# Altium PCB PCB1a.PcbDoc
Units mm, origin at the board's own origin, x right, y up, seen from the top; angles counter-clockwise.
Board outline 99.95 x 99.82 mm, 2 copper layers (Top Layer, Bottom Layer); 56 components, 64 nets, 272 pads, 29 vias.
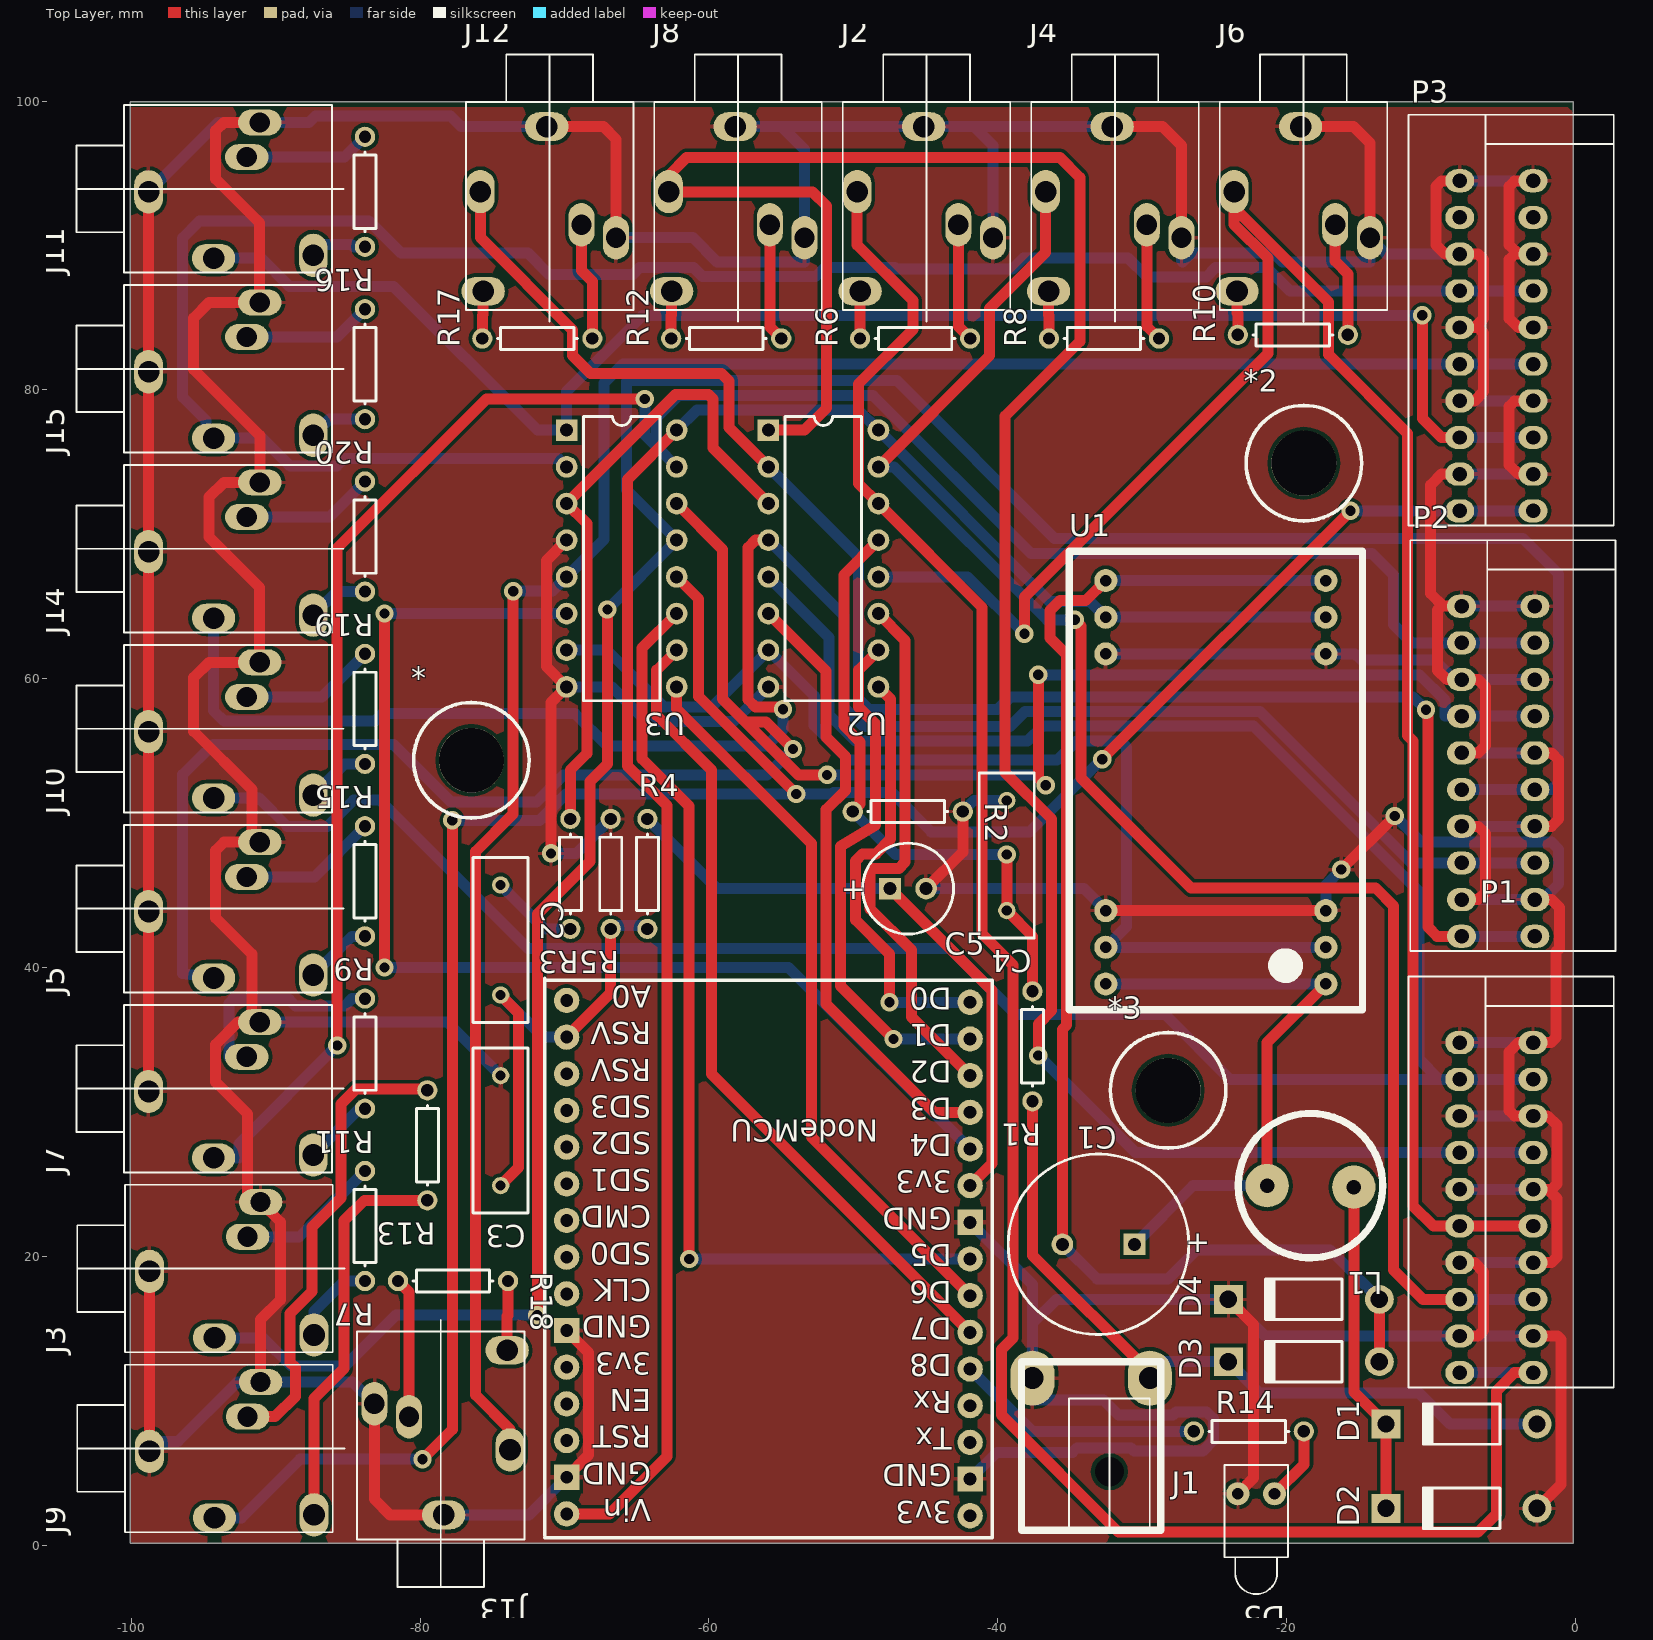
[diagram p0: Top Layer view]
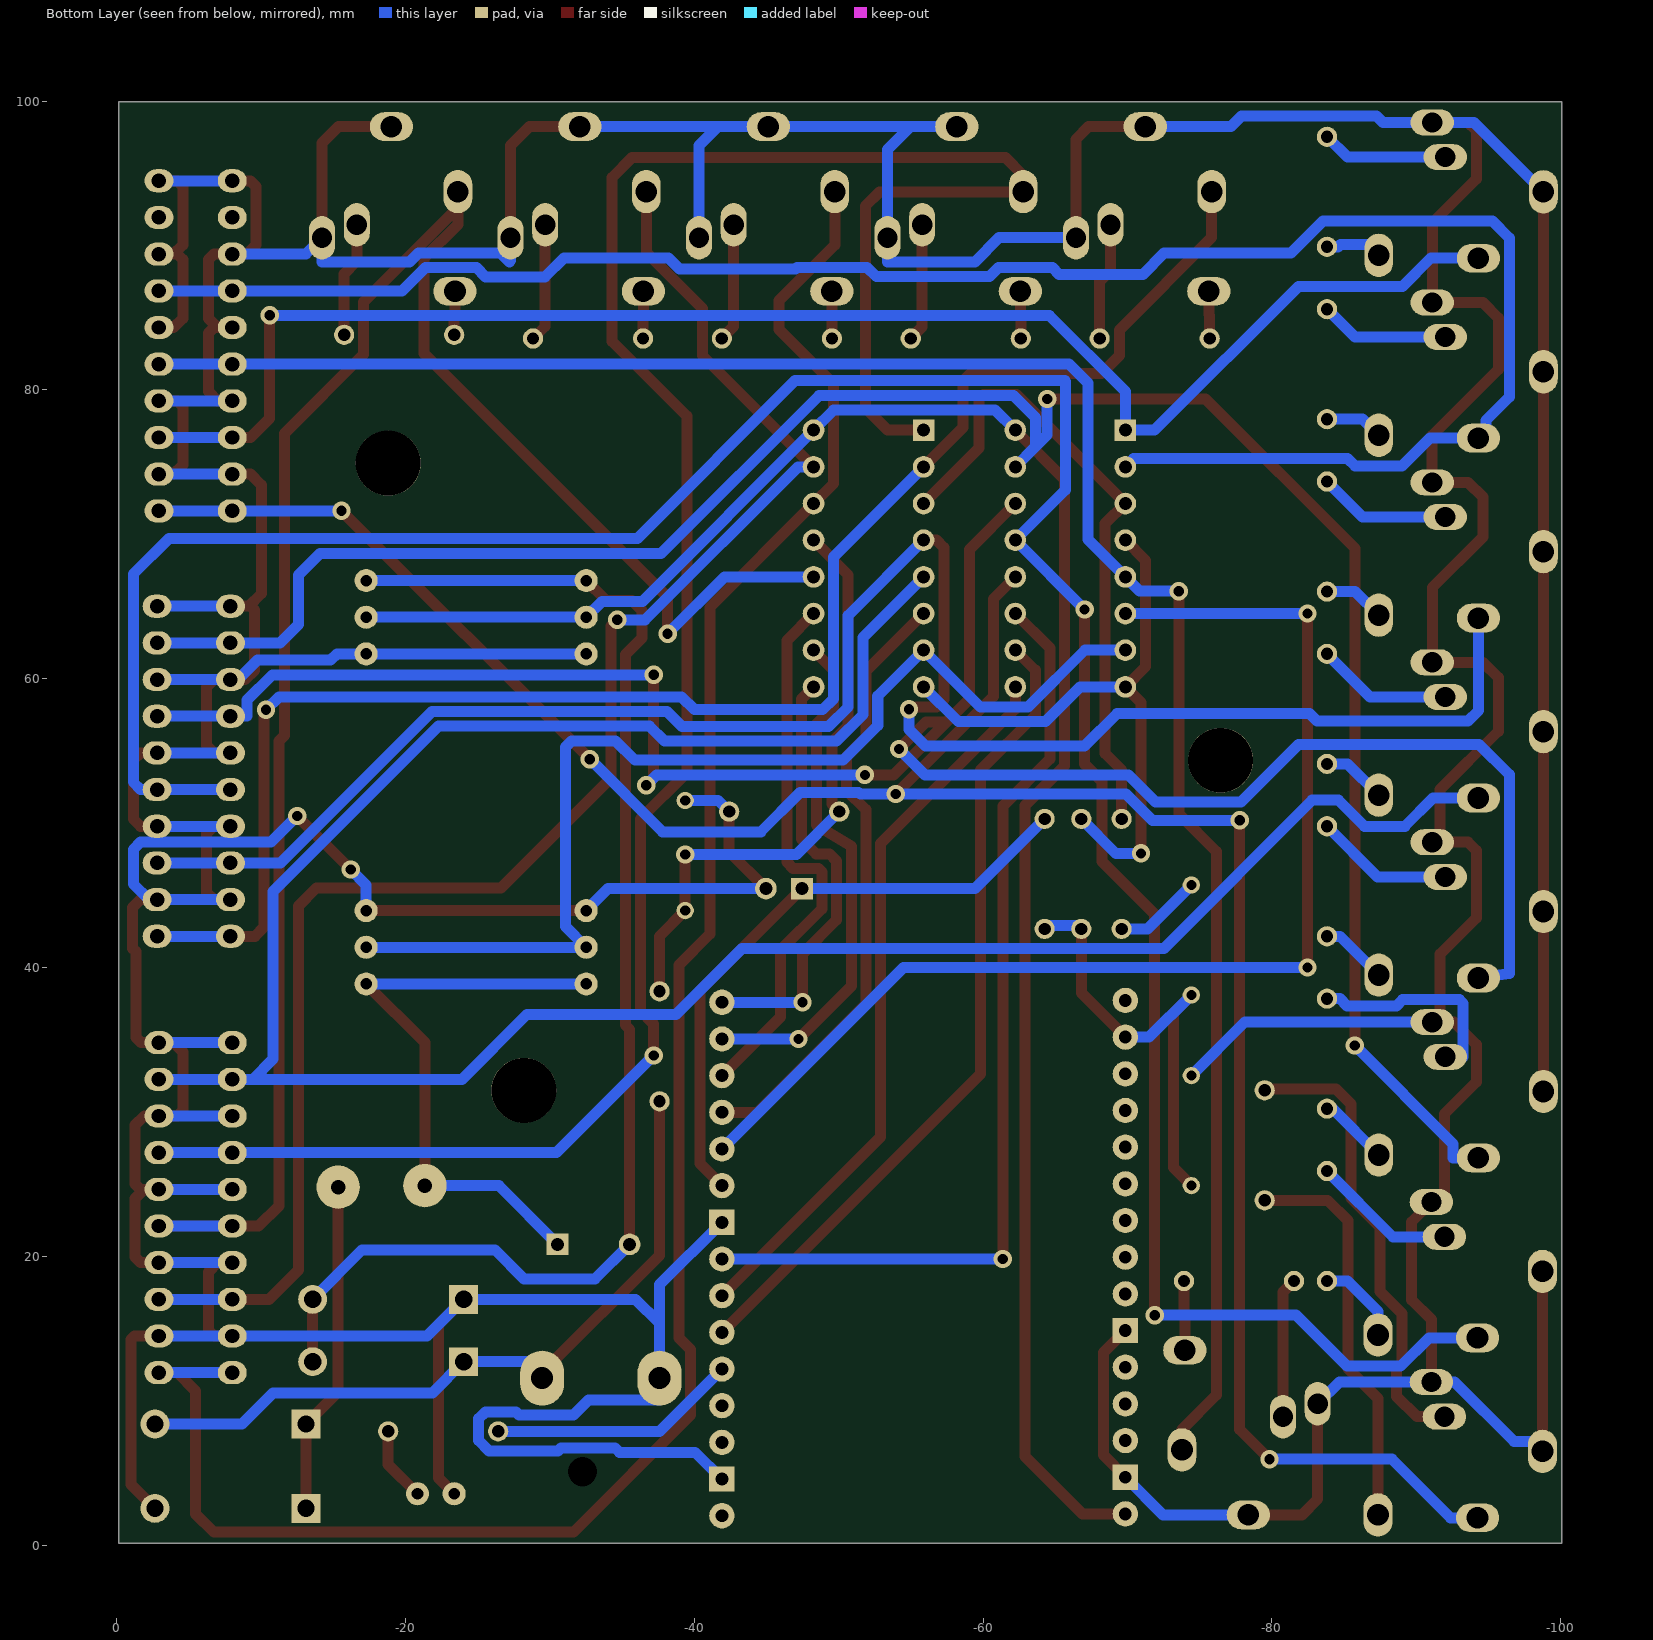
[diagram p1: Bottom Layer view, seen from below]

## Layer stack, top to bottom
Top Solder: solder mask 0.0102, Solder Resist, Dk 3.5
Top Layer: signal copper 0.0356
Dielectric 1: dielectric 0.32, FR-4, Dk 4.8
Bottom Layer: signal copper 0.0356
Bottom Solder: solder mask 0.0102, Solder Resist, Dk 3.5

## Board outline
-100.076,0.127 -0.127,0.127 -0.127,99.949 -100.076,99.949

## Design rules (kind name [scope] priority, off if disabled: settings)
Clearance Clearance_silk [OnLayer('Top Overlay')] p1: gap=0
Clearance [All] p2: gap=0.254
Height [All] p1 off: minheight=0 maxheight=25.4 prefheight=12.7
PolygonConnect [All] p1: connectstyle=Relief reliefconductorwidth=0.254 reliefentries=4 polygonreliefangle="90 Angle" airgapwidth=0.254
RoutingVias [All] p1: holewidth=0.711 width=1.27 viastyle="Through Hole" minholewidth=0.711 minwidth=1.27 maxholewidth=0.711 maxwidth=1.27
SilkToSilkClearance [All] p1 off: silktosilkclearance=0.254
SilkToSolderMaskClearance [IsPad] p1 off: minsilkscreentomaskgap=0.254 clearancetoexposedcopper=TRUE
SolderMaskExpansion [All] p1: expansion=0.102
Width [All] p1: maxlimit=2.54 minlimit=0.178 preferedwidth=0.762
27 further rules are at their usual default settings.

## Components (designator, comment, footprint, x,y, rotation, side; value= is the part's Value field where it differs from the comment)
* "M4 iso mount hole" "M4 HOLE" -76.454,54.356 r0 top
*2 "M4 iso mount hole" "M4 HOLE" -18.796,74.93 r0 top
*3 "M4 iso mount hole" "M4 HOLE" -28.194,31.496 r0 top
C1 "Cap Pol1" CAPPR5-12.5x25 -33.02,20.828 r180 top
C2 "Cap" RAD-0.3 -74.422,41.91 r90 top
C3 "Cap" RAD-0.3 -74.422,28.702 r270 top
C4 "Cap" RAD-0.3 -39.37,47.752 r270 top
C5 "Cap Pol1" CAPPR2.5-6.3x6.8/H.9 -46.208,45.466 r0 top
D1 "Diode 1N4001" DO-41 -7.874,8.382 r180 top
D2 "Diode 1N4001" DO-41 -7.874,2.54 r180 top
D3 "Diode 1N4001" DO-41 -18.796,12.7 r180 top
D4 "Diode 1N4001" DO-41 -18.796,17.018 r180 top
D5 "LED1" LED-1 -22.098,3.556 r270 top
J1 "Phonejack2" "Power jack 6x2mm" -38.354,12.7 r270 top
J2 "Phonejack Stereo SW" SJ1-3515 -39.228,85.64 r90 top
J3 "Phonejack Stereo SW" SJ1-3515 -86.148,24.852 r180 top
J4 "Phonejack Stereo SW" SJ1-3515 -26.175,85.64 r90 top
J5 "Phonejack Stereo SW" SJ1-3515 -86.206,49.777 r180 top
J6 "Phonejack Stereo SW" SJ1-3515 -13.122,85.64 r90 top
J7 "Phonejack Stereo SW" SJ1-3515 -86.206,37.315 r180 top
J8 "Phonejack Stereo SW" SJ1-3515 -52.281,85.64 r90 top
J9 "Phonejack Stereo SW" SJ1-3515 -86.148,12.39 r180 top
J10 "Phonejack Stereo SW" SJ1-3515 -86.206,62.239 r180 top
J11 "Phonejack Stereo SW" SJ1-3515 -86.206,99.626 r180 top
J12 "Phonejack Stereo SW" SJ1-3515 -65.334,85.64 r90 top
J13 "Phonejack Stereo SW" SJ1-3515 -84.272,14.69 r270 top
J14 "Phonejack Stereo SW" SJ1-3515 -86.206,74.701 r180 top
J15 "Phonejack Stereo SW" SJ1-3515 -86.206,87.164 r180 top
L1 "Inductor Iron" "Radial Vert Cylinder 10x19-6mm" -18.336,24.892 r180 top
NodeMCU "NodeMCU DevKit v1.0" "NodeMCU v0.9" -41.91,37.592 r180 top
P1 "Header 10" "Spring Terminal" -2.921,11.938 r90 top
P2 "Header 10" "Spring Terminal" -2.794,42.164 r90 top
P3 "Header 10" "Spring Terminal" -2.921,71.628 r90 top
R1 "Res1" AXIAL-0.3 -37.592,34.544 r270 top
R2 "Res1" AXIAL-0.3 -46.228,50.8 r0 top
R3 "Res1" AXIAL-0.3 -69.596,46.482 r270 top
R4 "Res1" AXIAL-0.3 -64.262,46.482 r90 top
R5 "Res1" AXIAL-0.3 -66.802,46.482 r270 top
R6 "Res1" AXIAL-0.3 -45.72,83.566 r180 top
R7 "Res1" AXIAL-0.3 -83.82,22.098 r270 top
R8 "Res1" AXIAL-0.3 -32.639,83.566 r180 top
R9 "Res1" AXIAL-0.3 -83.82,45.974 r270 top
R10 "Res1" AXIAL-0.3 -19.558,83.82 r180 top
R11 "Res1" AXIAL-0.3 -83.82,34.036 r270 top
R12 "Res1" AXIAL-0.3 -58.801,83.566 r180 top
R13 "Res1" AXIAL-0.3 -79.502,27.686 r270 top
R14 "Res1" AXIAL-0.3 -22.606,7.874 r0 top
R15 "Res1" AXIAL-0.3 -83.82,57.912 r270 top
R16 "Res1" AXIAL-0.3 -83.82,93.726 r270 top
R17 "Res1" AXIAL-0.3 -71.882,83.566 r180 top
R18 "Res1" AXIAL-0.3 -77.724,18.288 r0 top
R19 "Res1" AXIAL-0.3 -83.82,69.85 r270 top
R20 "Res1" AXIAL-0.3 -83.82,81.788 r270 top
U1 "EC3AW04" EC3AW -14.732,37.084 r90 top
U2 "MC74HC4051N" 648-08 -52.07,68.326 r270 top
U3 "MC74HC4051N" 648-08 -66.04,68.326 r270 top

## Footprints (in the part's own frame and the unit in brackets; to place one, negate y for a bottom-side part, rotate by r counter-clockwise, add the part's x,y. Pads: shape width x height; smd on the part's side, far side on the other; paste and mask are expansions set on the pad)
648-08 [mm] "DIP; 16 Leads; Row Spacing 7.62 mm; Pitch 2.54 mm"
  rect 1.5x1.5 hole 0.9: 1(-8.89,-3.81)
  round 1.5 hole 0.9: 2(-6.35,-3.81) 3(-3.81,-3.81) 4(-1.27,-3.81) 5(1.27,-3.81) 6(3.81,-3.81) 7(6.35,-3.81) 8(8.89,-3.81) 9(8.89,3.81) 10(6.35,3.81) 11(3.81,3.81) 12(1.27,3.81) 13(-1.27,3.81) 14(-3.81,3.81) 15(-6.35,3.81) 16(-8.89,3.81)
  silkscreen extent -9.85,-2.65 9.85,2.65
AXIAL-0.3 [mm] "Axial Device, Thru-Hole; 2 Leads; 0.3 in Pin Spacing"
  round 1.4 hole 0.85: 1(-3.81,0) 2(3.81,0)
  silkscreen extent -2.77,-0.76 2.77,0.76
CAPPR2.5-6.3x6.8/H.9 [mm] "Capacitor, Electrolytic, Radial; Body 6.3 x 6.8 mm (Dia.xH typ); Pin Spacing 2.5 mm (typ)"
  rect 1.5x1.5 hole 0.9: 1(-1.25,0)
  round 1.5 hole 0.9: 2(1.25,0)
  silkscreen extent -3.15,-3.15 3.15,3.15
CAPPR5-12.5x25 [mm] "Capacitor, Electrolytic, Radial; Body 12.5 x 25 mm (Dia.xH typ); Pin Spacing 5 mm (typ)"
  rect 1.5x1.5 hole 0.9: 1(-2.5,0)
  round 1.5 hole 0.9: 2(2.5,0)
  silkscreen extent -6.25,-6.25 6.25,6.25
DO-41 [mm] "Diode, Axial; Body 5.2 x 2.7 mm (LxDia. max), Lead Dia. 0.86 mm (max)"
  round 2 hole 1.2: 1(-5.23,0)
  rect 2x2 hole 1.2: 2(5.23,0)
  silkscreen extent -2.65,-1.4 2.75,1.4
EC3AW [mm]
  round 1.6 hole 0.8: 1(1.778,17.78) 1(1.778,2.54) 2(4.318,17.78) 2(4.318,2.54) 3(6.858,17.78) 3(6.858,2.54) 10(24.638,2.54) 10(24.638,17.78) 11(27.178,2.54) 11(27.178,17.78) 12(29.718,2.54) 12(29.718,17.78)
  silkscreen extent 0,0 31.75,20.32, body extent 0,0 31.75,20.32, height 10.16
LED-1 [mm] "LED; 2 Leads"
  round 1.6 hole 0.8: 1(0,1.27) 2(0,-1.27)
  silkscreen extent -2,-2.2 6.95,2.2
"M4 HOLE" [mm] "Isolated M4 mounting hole"
  round 4.5 hole 4.5 unplated paste+0.5: 0(0,0)
  Top Overlay keep-out circle w0.254: c0,0 r4
  silkscreen extent -4,-4 4,4
"NodeMCU v0.9" [mil]
  round 69 hole 35: 1(0,1400) 3(0,1200) 4(0,1100) 5(0,1000) 6(0,900) 7(0,800) 8(0,700) 10(0,500) 11(0,400) 12(0,300) 13(0,200) 14(0,100) 15(0,0) 16(1100,-5) 17(1100,95) 18(1100,195) 19(1100,295) 20(1100,395) 21(1100,495) 22(1100,595) 23(1100,695) 24(1100,795) 26(1100,995) 27(1100,1095) 28(1100,1195) 30(1100,1395)
  rect 69x69 hole 35: 2(0,1300) 9(0,600) 25(1100,895) 29(1100,1295)
  silkscreen extent -60,-65 1160,1460
"Power jack 6x2mm" [mil]
  round 0 hole 80 unplated: key(300,240)
  oval 150x120 hole 60: S(45,30) T(45,350)
  silkscreen extent 0,0 460,380, body extent 0,0 460,380, height 270
RAD-0.3 [mm] "Radial Cap, Thru-Hole; 2 Leads; 0.3 in Pin Spacing"
  round 1.2 hole 0.7: 1(-3.81,0) 2(3.81,0)
  silkscreen extent -5.71,-1.91 5.71,1.91
"Radial Vert Cylinder 10x19-6mm" [mm]
  round 3 hole 1: 1(-3,0.1) 2(3,0)
  silkscreen extent -5,-5 5,5, body extent -5,-5 5,5, height 19
SJ1-3515 [mm]
  oval 2x3 hole 1.5: 1-gnd(12.6,5.9) 5-tip-sw(1.2,10.3)
  oval 3x2 hole 1.5: 2-tip(8.1,10.5)
  oval 3x1.8 hole 1.4: 3-mid(4.9,1.1) 4-mid-sw(5.8,3.5)
  silkscreen extent -0.9,-0.1 17.6,11.5, body extent 0,0 14.2,11.4, height 1
"Spring Terminal" [mm]
  oval 1.6x2 hole 1: 1(0,5.08) 1(0,0) 2(2.54,5.08) 2(2.54,0) 3(5.08,0) 3(5.08,5.08) 4(7.62,0) 4(7.62,5.08) 5(10.16,0) 5(10.16,5.08) 6(12.7,0) 6(12.7,5.08) 7(15.24,0) 7(15.24,5.08) 8(17.78,0) 8(17.78,5.08) 9(20.32,0) 9(20.32,5.08) 10(22.86,0) 10(22.86,5.08)
  silkscreen extent -1.02,-5.59 27.43,8.64, body extent -0.8,-5.5 27.14,8.47, height 1

## Part data
C1 C5: "Polarized Capacitor (Radial)"
C2 C3 C4: "Capacitor"
D1 D2 D3 D4: "1 Amp General Purpose Rectifier"
D5: "Typical RED GaAs LED"
J1: "Jack Socket, 1/4\" [6.5mm], Thru-Hole, Vertical, 2-Conductor Open Circuit"
J2 J3 J4 J5 J6 J7 J8 J9 J10 J11 J12 J13 J14 J15: "3-Conductor Jack with 2 break contacts (normals) and 2 auxiliary make contacts"
L1: "Magnetic-Core Inductor"
P1 P2 P3: "Header, 10-Pin"
R1 R2 R3 R4 R5 R6 R7 R8 R9 R10 R11 R12 R13 R14 R15 R16 R17 R18 R19 R20: "Resistor"
U2 U3: "8-Channel Analog Multiplexer/Demultiplexer"

## Via types
v1: diameter 1.27, hole 0.711, Top Layer to Bottom Layer, 29 vias

## Nets (pads, with @x,y where several pads share a name; then routed paths per layer and width w, separated by ;. In a path a pad name is that pad's centre, name@x,y a point inside that pad or via, vN(x,y) a via of type N, cw(c..) or ccw(c..) an arc to the next point about the centre after c; other vN are vias at no path point)
A1: NodeMCU.13 U2.11 | length 37.7
  Top Layer w0.762: U2.11 -46.406,62.662 -46.406,47.295 -46.838,46.863 -48.59,46.863 -48.844,46.609 -48.844,44.069 -45.974,41.199 -45.974,36.576 NodeMCU.13
A2: NodeMCU.8 U3.11 | length 66.5
  Top Layer w0.762: U3.11 -64.631,62.115 -64.631,54.459 -61.366,51.194 v1(-61.366,19.812)
  Bottom Layer w0.762: v1(-61.366,19.812) NodeMCU.8
ADC: C2.1 C3.2 NodeMCU.17 R4.1 R5.2 | length 31.5
  Top Layer w0.762: C3.2 -73.177,26.137 -73.177,36.855 C2.1 ; NodeMCU.17 -66.802,38.227 R5.2
  Bottom Layer w0.762: C2.1 -71.501,35.179 NodeMCU.17 ; R5.2 -66.568,42.906 -64.496,42.906 R4.1
B1: NodeMCU.14 U2.10 | length 36.2
  Top Layer w0.762: U2.10 -49.645,60.591 -49.645,58.039 -48.457,56.851 -48.457,49.86 -50.876,48.387 -50.876,38.71 v1(-47.219,35.052)
  Bottom Layer w0.762: v1(-47.219,35.052) NodeMCU.14
B2: NodeMCU.6 U3.10 | length 56.8
  Top Layer w0.762: U3.10 -63.615,60.591 -63.615,57.47 -59.817,53.672 -59.817,32.639 NodeMCU.6
C1: NodeMCU.15 U2.9 | length 30.3
  Top Layer w0.762: U2.9 -47.422,58.598 -47.422,48.895 -48.438,47.879 -49.352,47.879 -49.86,47.371 -49.86,43.307 -47.498,40.945 v1(-47.498,37.592)
  Bottom Layer w0.762: v1(-47.498,37.592) NodeMCU.15
C2: NodeMCU.7 U3.9 | length 50.6
  Top Layer w0.762: U3.9 -62.23,57.911 -52.908,48.589 -52.908,28.27 NodeMCU.7
EN1: NodeMCU.12 U2.6 | length 42.9
  Top Layer w0.762: U2.6 -51.892,60.528 -51.892,55.956 -50.546,54.61 -50.546,52.273 -51.892,50.927 -51.892,37.475 -44.389,29.972 NodeMCU.12
EN2: NodeMCU.11 U3.6 | length 82.9
  Top Layer w0.762: v1(-82.474,40.005) v1(-82.474,64.516)
  Bottom Layer w0.762: v1(-82.474,40.005) -54.483,40.005 NodeMCU.11 ; v1(-82.474,64.516) U3.6
GND: C3.1 C4.1 C5.2 D2.1 D4.2 D5.2 J1.S J2.1-gnd J2.3-mid J3.1-gnd J3.3-mid J4.1-gnd J4.3-mid J5.1-gnd J5.3-mid J6.1-gnd J6.3-mid J7.1-gnd J7.3-mid J8.1-gnd J8.3-mid J9.1-gnd J9.3-mid J10.1-gnd J10.3-mid J11.1-gnd J11.3-mid J12.1-gnd J12.3-mid J13.1-gnd J13.3-mid J14.1-gnd J14.3-mid J15.1-gnd J15.3-mid NodeMCU.2 NodeMCU.9 NodeMCU.25 NodeMCU.29 P1.2 P1.4 P1.6 P1.8 P1.10 P2.2 P2.4 P2.6 P2.8 P2.10 P3.2 P3.4 P3.6 P3.8 P3.10 R2.2 R5.1 U1.3 U1.10 U2.8 U3.4 U3.8 | length 843.9
  Top Layer w0.762: J7.1-gnd J5.1-gnd J10.1-gnd J14.1-gnd J15.1-gnd J11.1-gnd ; J9.1-gnd J3.1-gnd ; J7.3-mid J7.3-mid@-91.643,36.215 ; J5.3-mid J5.3-mid@-91.643,48.677 ; J10.3-mid J10.3-mid@-91.11,61.139 ; J15.3-mid J15.3-mid@-91.11,86.064 ; J11.3-mid -93.599,98.526 -94.158,97.967 -94.158,94.615 -91.11,91.567 J15.3-mid@-91.11,86.064 ; J9.3-mid -91.048,15.621 -89.687,16.982 -89.687,22.392 J3.3-mid -91.948,23.752 -91.948,29.87 -94.158,32.08 -94.158,34.671 -92.614,36.215 J7.3-mid@-91.643,36.215 ; J13.3-mid -83.172,3.175 -82.087,2.09 J13.1-gnd ; J12.1-gnd -67.31,98.24 -66.434,97.364 J12.3-mid ; v1(-70.942,47.904) -70.942,58.344 U3.8 -71.247,60.833 -71.247,68.199 U3.4 ; NodeMCU.29 -68.326,6.223 -68.326,13.335 NodeMCU.25 ; C5.2 -42.418,48.006 R2.2 ; U1.3@-32.512,43.942 U1.3@-17.272,43.942 ; J4.1-gnd -28.575,98.24 -27.275,96.94 J4.3-mid ; D4.2 -22.276,15.268 -22.276,4.648 D5.2 ; J6.1-gnd -15.367,98.24 -14.222,97.095 J6.3-mid ; v1(-16.205,46.787) v1(-12.497,50.495) ; P1.2@-8.001,14.478 -6.731,14.478 -6.35,14.859 -6.35,18.923 -6.985,19.558 P1.4@-8.001,19.558 ; P3.2@-8.001,74.168 -9.271,74.168 -10.008,73.431 -10.008,65.888 -9.144,65.024 ; P3.4@-8.001,79.248 -6.985,79.248 -6.35,79.883 -6.35,83.947 -6.858,84.455 ; P3.6@-8.001,84.328 -6.985,84.328 -6.858,84.455 ; P3.10@-8.001,94.488 -9.271,94.488 -9.652,94.107 -9.652,90.043 -9.017,89.408 -8.001,89.408 -6.731,89.408 -6.35,89.027 -6.35,84.963 -6.858,84.455 ; P2.2@-7.874,44.704 -6.731,44.704 -6.223,45.212 -6.223,49.276 -6.731,49.784 P2.4@-7.874,49.784 ; P2.6@-7.874,54.864 -6.731,54.864 -6.223,55.372 -6.223,59.436 -6.731,59.944 -7.874,59.944 -8.89,59.944 -9.525,60.579 -9.525,64.77 -9.271,65.024 -9.144,65.024 ; P2.10@-7.874,65.024 -9.144,65.024 ; P1.2@-2.921,14.478 -1.219,14.478 -0.991,14.249 -0.991,4.193 D2.1 ; P1.4@-2.921,19.558 -1.651,19.558 -1.27,19.939 -1.27,24.003 -1.778,24.511 ; P1.6@-2.921,24.638 -1.905,24.638 -1.778,24.511 ; P3.2@-2.921,74.168 -3.937,74.168 -4.572,74.803 -4.572,78.867 -4.191,79.248 P3.4@-2.921,79.248 ; P3.6@-2.921,84.328 -3.937,84.328 -4.572,84.963 -4.572,89.027 -4.191,89.408 -3.937,89.408 ; P3.8@-2.921,89.408 -3.937,89.408 ; P3.10@-2.921,94.488 -4.191,94.488 -4.572,94.107 -4.572,90.043 -3.937,89.408 ; P2.2@-2.794,44.704 -1.651,44.704 -1.092,44.145 -1.092,41.326 -1.321,41.097 -1.321,35.154 -1.676,34.798 -2.921,34.798 -3.937,34.798 -4.572,34.163 -4.572,30.099 -4.191,29.718 -2.921,29.718 -1.905,29.718 -1.27,29.083 -1.27,25.019 -1.778,24.511 ; P2.4@-2.794,49.784 -1.651,49.784 -1.143,50.292 -1.143,54.356 -1.651,54.864 P2.6@-2.794,54.864 ; J7.3-mid@-91.643,36.215 -91.643,40.919 -94.158,43.434 -94.158,48.118 -93.599,48.677 J5.3-mid@-91.643,48.677 ; J5.3-mid@-91.643,48.677 -91.643,52.324 -95.682,56.363 -95.682,60.072 -94.615,61.139 J10.3-mid@-91.11,61.139 ; J10.3-mid@-91.11,61.139 -91.11,66.319 -94.615,69.825 -94.615,72.585 -93.599,73.601 J14.3-mid -91.106,76.831 -95.682,81.407 -95.682,84.997 -94.615,86.064 J15.3-mid@-91.11,86.064
  Bottom Layer w0.762: J11.1-gnd -94.006,98.526 J11.3-mid -87.706,98.526 -87.248,98.984 -77.902,98.984 -77.158,98.24 J12.1-gnd ; J9.1-gnd -98.748,7.163 -96.786,7.163 -92.659,11.29 J9.3-mid -84.672,11.29 J13.3-mid ; J7.3-mid -78.125,36.215 C3.1 ; J13.1-gnd -72.459,2.09 NodeMCU.29 ; v1(-70.942,47.904) -69.19,47.904 R5.1 ; U3.8 -66.726,59.436 -64.325,57.035 -58.281,57.035 U2.8 ; J12.3-mid -66.434,90.551 -61.106,90.551 -59.43,88.875 -53.381,88.875 J8.3-mid -53.381,96.647 -54.974,98.24 ; J8.1-gnd -54.974,98.24 ; C5.2 -34.036,45.466 U1.3@-32.512,43.942 ; R2.2 -41.656,51.562 C4.1 ; NodeMCU.2 -40.056,6.426 -34.823,6.426 -34.519,6.731 -30.759,6.731 -30.556,6.528 -25.781,6.528 -25.07,7.239 -25.07,8.763 -25.527,9.22 -27.661,9.22 -27.864,9.017 -31.623,9.017 -32.664,10.058 -37.592,10.058 J1.S -37.592,15.367 ; NodeMCU.9 -37.592,18.034 -37.592,15.367 ; J2.3-mid -40.328,96.937 -41.631,98.24 ; U1.10@-32.512,61.722 -17.272,61.722 -15.24,61.722 -14.808,61.29 -9.754,61.29 -8.407,59.944 -7.874,59.944 P2.8@-2.794,59.944 ; J4.1-gnd -41.631,98.24 ; J4.3-mid -27.275,88.96 -27.189,88.875 -26.573,89.491 -20.887,89.491 -20.271,88.875 -14.222,88.875 J6.3-mid -13.09,89.408 P3.8@-8.001,89.408 ; U1.3@-17.272,43.942 -17.272,45.72 v1(-16.205,46.787) ; v1(-12.497,50.495) -10.693,48.692 -1.651,48.692 -1.143,48.184 -1.143,45.796 -2.235,44.704 -2.794,44.704 P2.2@-7.874,44.704 ; P1.4@-8.001,19.558 P1.4@-2.921,19.558 ; P1.6@-8.001,24.638 P1.6@-2.921,24.638 ; P1.8@-8.001,29.718 P1.8@-2.921,29.718 ; P1.10@-8.001,34.798 P1.10@-2.921,34.798 ; P3.2@-8.001,74.168 P3.2@-2.921,74.168 ; P3.4@-8.001,79.248 P3.4@-2.921,79.248 ; P3.10@-8.001,94.488 P3.10@-2.921,94.488 ; P2.4@-7.874,49.784 P2.4@-2.794,49.784 ; P2.6@-7.874,54.864 P2.6@-2.794,54.864 ; P2.10@-7.874,65.024 P2.10@-2.794,65.024 ; P1.2@-2.921,14.478 -8.001,14.478 -21.486,14.478 D4.2 -35.941,17.018 -37.592,15.367 ; -54.974,98.24 J2.1-gnd -41.631,98.24
NetC1_1: C1.1 L1.2 U1.1 | length 41.8
  Top Layer w0.762: L1.2 -21.336,34.798 U1.1@-17.272,38.862
  Bottom Layer w0.762: U1.1@-32.512,38.862 U1.1@-17.272,38.862 ; C1.1 -26.456,24.892 L1.2
NetC1_2: C1.2 D3.1 D4.1 U1.12 | length 94
  Top Layer w0.762: C1.2 -35.52,35.724 -35.241,36.003 -35.241,61.675 -36.378,62.812 -36.378,64.72 -35.687,65.411 -33.903,65.411 U1.12@-32.512,66.802 ; D3.1 D4.1
  Bottom Layer w0.762: C1.2 -33.107,18.415 -28.219,18.415 -26.213,20.422 -16.97,20.422 D4.1 ; U1.12@-32.512,66.802 U1.12@-17.272,66.802
NetC2_2: C2.2 R3.2 | length 6.1
  Bottom Layer w0.762: C2.2 -71.374,42.672 R3.2
NetC4_2: C4.2 R1.1 R2.1 U2.13 | length 42.6
  Top Layer w0.762: R2.1 -49.53,51.308 -49.53,55.626 -50.661,56.757 -50.661,67.195 U2.13 ; v1(-39.37,47.828) C4.2 -37.592,42.164 R1.1
  Bottom Layer w0.762: R2.1 -47.066,47.828 v1(-39.37,47.828)
NetC5_1: C5.1 NodeMCU.10 R4.2 | length 42.9
  Top Layer w0.762: C5.1 -40.386,38.394 -40.386,26.416 NodeMCU.10
  Bottom Layer w0.762: R4.2 -59.436,45.466 C5.1
NetD1_2: D1.2 D2.2 L1.1 | length 23.2
  Top Layer w0.762: L1.1 -15.336,10.614 D1.2 D2.2
NetD5_1: D5.1 R14.2 | length 5.2
  Top Layer w0.762: D5.1 -18.796,5.588 R14.2
NetJ2_4-mid-sw: J2.4-mid-sw R6.1 | length 8.2
  Top Layer w0.762: J2.4-mid-sw -42.728,84.384 R6.1
NetJ2_5-tip-sw: J2.5-tip-sw R6.2 | length 3.3
  Top Layer w0.762: R6.2 -49.53,85.192 -49.528,85.194 J2.5-tip-sw
NetJ3_4-mid-sw: J3.4-mid-sw R7.1 | length 10
  Bottom Layer w0.762: J3.4-mid-sw -88.376,21.352 R7.1
NetJ3_5-tip-sw: J3.5-tip-sw R7.2 | length 6
  Bottom Layer w0.762: J3.5-tip-sw -87.348,16.182 -85.242,18.288 R7.2
NetJ4_4-mid-sw: J4.4-mid-sw R8.1 | length 8.2
  Top Layer w0.762: J4.4-mid-sw -29.675,84.412 R8.1
NetJ4_5-tip-sw: J4.5-tip-sw R8.2 | length 3.3
  Top Layer w0.762: J4.5-tip-sw -36.475,85.192 -36.449,85.166 R8.2
NetJ5_4-mid-sw: J5.4-mid-sw R9.1 | length 9.6
  Bottom Layer w0.762: J5.4-mid-sw -87.327,46.277 R9.1
NetJ5_5-tip-sw: J5.5-tip-sw R9.2 | length 4.7
  Bottom Layer w0.762: J5.5-tip-sw -84.719,42.164 R9.2
NetJ6_4-mid-sw: J6.4-mid-sw R10.1 | length 8
  Top Layer w0.762: J6.4-mid-sw -16.622,88.921 -15.748,88.047 R10.1
NetJ6_5-tip-sw: J6.5-tip-sw R10.2 | length 3
  Top Layer w0.762: J6.5-tip-sw -23.422,85.347 -23.368,85.293 R10.2
NetJ7_4-mid-sw: J7.4-mid-sw R11.1 | length 14.9
  Bottom Layer w0.762: J7.4-mid-sw -93.243,33.815 -93.243,37.516 -92.989,37.77 -89.052,37.77 -88.621,37.338 -85.217,37.338 -84.709,37.846 R11.1
NetJ7_5-tip-sw: J7.5-tip-sw R11.2 | length 4.9
  Bottom Layer w0.762: J7.5-tip-sw -84.195,30.226 R11.2
NetJ8_4-mid-sw: J8.4-mid-sw R12.1 | length 8.2
  Top Layer w0.762: J8.4-mid-sw -55.781,84.356 R12.1
NetJ8_5-tip-sw: J8.5-tip-sw R12.2 | length 3.3
  Top Layer w0.762: R12.2 -62.611,85.166 -62.581,85.196 J8.5-tip-sw
NetJ9_4-mid-sw: J9.4-mid-sw R13.1 | length 32.2
  Top Layer w0.762: J9.4-mid-sw -90.043,8.89 -88.646,10.287 -88.646,12.294 -89.002,12.649 -89.002,16.027 -87.478,17.551 -87.478,22.022 -85.471,24.028 -85.471,30.556 -84.455,31.572 -79.578,31.572 R13.1
NetJ9_5-tip-sw: J9.5-tip-sw R13.2 | length 27.6
  Top Layer w0.762: J9.5-tip-sw -87.348,10.137 -85.268,12.217 -85.268,22.479 -83.871,23.876 R13.2
NetJ10_4-mid-sw: J10.4-mid-sw R15.1 | length 9.4
  Bottom Layer w0.762: J10.4-mid-sw -86.803,58.739 R15.1
NetJ10_5-tip-sw: J10.5-tip-sw R15.2 | length 4.5
  Bottom Layer w0.762: J10.5-tip-sw -85.243,54.102 R15.2
NetJ11_4-mid-sw: J11.4-mid-sw R16.1 | length 8.8
  Bottom Layer w0.762: J11.4-mid-sw -85.23,96.126 R16.1
NetJ11_5-tip-sw: J11.5-tip-sw R16.2 | length 4
  Bottom Layer w0.762: J11.5-tip-sw -86.64,90.092 -84.755,90.092 -84.579,89.916 R16.2
NetJ12_4-mid-sw: J12.4-mid-sw R17.1 | length 8.2
  Top Layer w0.762: J12.4-mid-sw -68.834,88.265 -68.072,87.503 R17.1
NetJ12_5-tip-sw: J12.5-tip-sw R17.2 | length 3.3
  Top Layer w0.762: R17.2 -75.692,85.166 -75.634,85.224 J12.5-tip-sw
NetJ13_4-mid-sw: J13.4-mid-sw R18.1 | length 9.7
  Top Layer w0.762: R18.1 -80.772,17.526 J13.4-mid-sw
NetJ13_5-tip-sw: J13.5-tip-sw R18.2 | length 4.8
  Top Layer w0.762: J13.5-tip-sw -73.972,15.85 -73.914,15.908 R18.2
NetJ14_4-mid-sw: J14.4-mid-sw R19.1 | length 9.2
  Bottom Layer w0.762: J14.4-mid-sw -86.279,71.201 R19.1
NetJ14_5-tip-sw: J14.5-tip-sw R19.2 | length 4.3
  Bottom Layer w0.762: J14.5-tip-sw -85.767,66.04 R19.2
NetJ15_4-mid-sw: J15.4-mid-sw R20.1 | length 9
  Bottom Layer w0.762: J15.4-mid-sw -85.754,83.664 R20.1
NetJ15_5-tip-sw: J15.5-tip-sw R20.2 | length 4
  Bottom Layer w0.762: J15.5-tip-sw -86.292,77.978 R20.2
NetNodeMCU_5: NodeMCU.5 R14.1 | length 17.3
  Bottom Layer w0.762: NodeMCU.5 -37.592,7.874 R14.1
NetR3_1: R3.1 U2.3 U3.3 | length 45.1
  Top Layer w0.762: R3.1 -69.596,53.696 -68.453,54.839 -68.453,70.739 U3.3 -62.306,79.68 -60.02,79.68 -59.715,79.375 -59.715,75.971 U2.3
S1: J2.2-tip P1.1 U2.14 | length 147.5
  Top Layer w0.762: J2.2-tip -49.728,90.043 -45.872,86.187 -45.872,84.201 -49.657,80.416 -49.657,73.533 U2.14 -41.072,64.948 -41.072,42.316 -38.938,40.183 -38.938,14.351 -39.751,13.538 -39.751,9.017 -31.623,0.889 -6.731,0.889 -5.461,2.159 -5.461,10.668 -4.191,11.938 P1.1@-2.921,11.938
  Bottom Layer w0.762: P1.1@-8.001,11.938 P1.1@-2.921,11.938
S2: J4.2-tip P1.3 U2.15 | length 114
  Top Layer w0.762: U2.15 -40.564,82.372 -40.564,85.646 -36.675,89.535 J4.2-tip ; v1(-34.671,64.084) -34.225,63.638 -34.225,53.137 -26.605,45.517 -13.818,45.517 -12.573,44.272 -12.573,19.05 -10.541,17.018 P1.3@-8.001,17.018
  Bottom Layer w0.762: U2.15 -47.168,74.676 -36.576,64.084 v1(-34.671,64.084) ; P1.3@-8.001,17.018 P1.3@-2.921,17.018
S3: J6.2-tip P1.5 U2.12 | length 138.6
  Top Layer w0.762: v1(-38.151,63.119) -38.151,65.671 -21.285,82.537 -21.285,89.129 -23.622,91.465 J6.2-tip@-23.622,92.634 ; J6.2-tip J6.2-tip@-23.622,92.634 ; P1.5@-2.921,22.098 -8.001,22.098 -9.83,22.098 -11.227,23.495 -11.227,55.702 -11.608,56.083 -11.608,76.987 -17.094,82.474 -17.094,86.106 J6.2-tip@-23.622,92.634
  Bottom Layer w0.762: U2.12 -42.088,67.056 v1(-38.151,63.119) ; P1.5@-8.001,22.098 P1.5@-2.921,22.098
S4: J8.2-tip P1.7 U2.1 | length 162.4
  Top Layer w0.762: U2.1 -53.391,77.216 -51.841,78.765 -51.841,92.735 -52.832,93.726 -62.781,93.726 J8.2-tip -62.781,94.869 -61.562,96.088 -35.687,96.088 -34.315,94.717 -34.315,83.363 -39.497,78.181 -39.497,53.518 -36.257,50.278 -36.257,37.008 -37.186,36.079 v1(-37.186,33.909)
  Bottom Layer w0.762: v1(-37.186,33.909) -30.455,27.178 -8.001,27.178 P1.7@-2.921,27.178
S5: J10.2-tip P1.9 U2.5 | length 172.6
  Bottom Layer w0.762: J10.2-tip -91.16,51.739 -89.205,49.784 -86.411,49.784 -84.607,51.587 -82.779,51.587 -72.517,41.326 -43.307,41.326 -38.735,36.754 -28.397,36.754 -23.901,32.258 -9.423,32.258 ; U2.5 -51.677,62.853 -51.677,57.508 -49.846,55.677 -37.922,55.677 -36.881,56.718 -22.276,56.718 -10.82,45.263 -10.82,33.655 -9.423,32.258 ; P1.9@-2.921,32.258 -8.001,32.258 -9.423,32.258
S6: J12.2-tip P2.1 U2.2 | length 114.4
  Top Layer w0.762: J12.2-tip -75.834,90.551 -69.444,84.161 -69.444,82.398 -68.199,81.153 -59.128,81.153 -58.608,80.633 -58.608,77.404 U2.2 ; v1(-10.338,57.861) -10.211,57.734 -10.211,42.799 -9.576,42.164 P2.1@-7.874,42.164
  Bottom Layer w0.762: U2.2 -49.645,68.441 -49.645,58.611 -48.895,57.861 -40.014,57.861 -39.125,58.75 -11.227,58.75 v1(-10.338,57.861) ; P2.1@-7.874,42.164 P2.1@-2.794,42.164
S7: J14.2-tip P2.3 U2.4 | length 130.9
  Top Layer w0.762: U2.4 -56.769,69.596 -57.277,69.088 -57.277,58.547 -56.769,58.039 -55.016,58.039 v1(-54.864,57.887)
  Bottom Layer w0.762: J14.2-tip -94.31,64.201 -94.31,57.785 -93.599,57.074 -83.134,57.074 -82.601,57.607 -69.291,57.607 -67.031,55.347 -56.007,55.347 -54.864,56.49 v1(-54.864,57.887) ; U2.4 -50.661,64.377 -50.661,58.052 -49.301,56.693 -39.15,56.693 -38.109,57.734 -21.844,57.734 -11.354,47.244 -7.874,47.244 P2.3@-2.794,47.244
S8: J3.2-tip P2.5 U3.13 | length 186.3
  Top Layer w0.762: v1(-71.882,15.926) -71.882,43.696 -68.25,47.328 -68.25,52.883 -67.031,54.102 v1(-67.031,64.795)
  Bottom Layer w0.762: J3.2-tip -90.883,14.352 -88.925,12.395 -85.217,12.395 -81.686,15.926 v1(-71.882,15.926) ; v1(-67.031,64.795) U3.13 -65.722,73.088 -65.722,80.582 -65.659,80.645 -46.976,80.645 -36.054,69.723 -3.607,69.723 -1.143,67.259 -1.143,52.832 -1.651,52.324 -2.794,52.324 P2.5@-7.874,52.324
S9: J5.2-tip P2.7 U3.14 | length 150.1
  Top Layer w0.762: U3.14 -59.055,68.961 -59.055,58.585 -57.48,57.011 ; v1(-54.181,55.137) -56.055,57.011 -57.48,57.011 ; v1(-51.816,53.34) -53.81,53.34 -57.48,57.011 ; v1(-37.186,60.274) -37.186,53.137 v1(-36.678,52.629)
  Bottom Layer w0.762: J5.2-tip -96.444,39.582 -96.444,53.365 -94.361,55.448 -81.839,55.448 -77.851,51.46 -71.947,51.46 -70.067,53.34 -55.977,53.34 v1(-54.181,55.137) ; v1(-51.816,53.34) -37.389,53.34 v1(-36.678,52.629) ; v1(-37.186,60.274) -10.77,60.274 -9.017,58.522 -9.017,57.404 -7.874,57.404 P2.7@-2.794,57.404
S10: J7.2-tip P2.9 U3.15 | length 150.6
  Top Layer w0.762: v1(-85.75,34.595) -85.75,69.037 -75.413,79.375 v1(-64.44,79.375)
  Bottom Layer w0.762: J7.2-tip -92.558,26.815 -92.558,27.788 v1(-85.75,34.595) ; v1(-64.44,79.375) -64.44,76.886 -63.627,76.073 ; U3.15 -63.627,76.073 ; P2.9@-2.794,62.484 -7.874,62.484 -11.303,62.484 -12.573,63.754 -12.573,67.183 -14.072,68.682 -37.706,68.682 -48.653,79.629 -62.103,79.629 -63.627,78.105 -63.627,76.073
S11: J9.2-tip P3.1 U3.12 | length 165.7
  Top Layer w0.762: v1(-79.832,5.944) -77.775,8.001 v1(-77.775,50.19) ; U3.12 -60.706,65.532 -60.706,58.776 v1(-53.95,52.019) ; v1(-32.766,54.432) v1(-15.57,71.628)
  Bottom Layer w0.762: J9.2-tip -92.38,1.89 -88.326,5.944 v1(-79.832,5.944) ; v1(-77.775,50.19) -71.73,50.19 -69.901,52.019 v1(-53.95,52.019) -51.5,52.019 -51.384,52.135 -47.334,52.135 -44.602,49.403 -37.795,49.403 v1(-32.766,54.432) ; v1(-15.57,71.628) -8.001,71.628 P3.1@-2.921,71.628
S12: J11.2-tip P3.3 U3.1 | length 108.9
  Top Layer w0.762: v1(-10.592,85.166) -10.592,78.029 -9.271,76.708 P3.3@-8.001,76.708
  Bottom Layer w0.762: J11.2-tip -91.006,89.126 -89.052,87.173 -81.839,87.173 -71.882,77.216 U3.1 -69.85,79.9 -64.584,85.166 v1(-10.592,85.166) ; P3.3@-8.001,76.708 P3.3@-2.921,76.708
S13: J13.2-tip P3.5 U3.5 | length 145
  Top Layer w0.762: J13.2-tip -73.772,8.011 -76.149,10.389 -76.149,48.031 -73.558,50.622 v1(-73.558,66.065)
  Bottom Layer w0.762: v1(-73.558,66.065) -70.841,66.065 U3.5 -67.259,69.647 -67.259,80.482 -65.953,81.788 -8.001,81.788 P3.5@-2.921,81.788
S14: J15.2-tip P3.7 U3.2 | length 138.8
  Bottom Layer w0.762: U3.2 -70.434,75.26 -85.242,75.26 -85.776,74.727 -89.002,74.727 -90.939,76.664 J15.2-tip -94.818,76.664 -94.818,77.902 -96.444,79.527 -96.444,90.526 -95.275,91.694 -83.541,91.694 -81.331,89.484 -72.542,89.484 -71.069,88.011 -65.259,88.011 -64.795,88.475 -61.068,88.475 -60.452,87.859 -52.603,87.859 -51.968,88.494 -47.117,88.494 -47.015,88.392 -38.989,88.392 -38.227,89.154 -30.963,89.154 -29.642,87.833 -25.552,87.833 -24.911,88.475 -21.368,88.475 -19.761,86.868 -8.001,86.868 P3.7@-2.921,86.868
VCC: NodeMCU.30 U1.11 U2.16 U3.16 | length 133.7
  Top Layer w0.762: NodeMCU.30 -66.878,2.159 -62.916,6.121 -62.916,51.22 -65.647,53.951 -65.647,73.799 U3.16
  Bottom Layer w0.762: U3.16 -60.833,78.613 -49.657,78.613 U2.16 -36.398,65.354 -33.604,65.354 -32.512,64.262 U1.11@-17.272,64.262
VEE: U1.2 U2.7 U3.7 | length 76.8
  Bottom Layer w0.762: U3.7 -67.044,61.976 -63.119,58.051 -59.805,58.051 U2.7 -52.705,58.801 -52.705,56.769 -50.292,54.356 -35.898,54.356 -34.551,55.702 -31.496,55.702 -31.064,55.27 -31.064,42.85 -32.512,41.402 U1.2@-17.272,41.402
"~12.8V RMS": D1.1 D3.2 J1.T R1.2 | length 52.3
  Top Layer w0.762: R1.2 -37.592,20.066 -29.464,11.938 J1.T
  Bottom Layer w0.762: J1.T -29.464,12.7 D3.2 -21.867,10.541 -10.82,10.541 -8.661,8.382 D1.1
pads on no net: *2.0 *3.0 *.0 J1.key NodeMCU.1 NodeMCU.3 NodeMCU.4 NodeMCU.16 NodeMCU.18 NodeMCU.19 NodeMCU.20 NodeMCU.21 NodeMCU.22 NodeMCU.23 NodeMCU.24 NodeMCU.26 NodeMCU.27 NodeMCU.28 P3.9

## Polygon pours and split planes (outlines as drawn)
GND on Top Layer "GND_L01_P006" (solid, remove dead copper, pour order 6): -100.076,99.568 -0.508,99.568 -0.254,99.822 -0.127,99.695 -0.127,0.127 -99.949,0.127 -100.076,0.254

## Silkscreen, mask and mechanical layers (free items; w line width, h text height)
Mechanical 1:
  lines w0.127: -100.33,0 0,0 0,100.33 -100.33,100.33 -100.33,0

## Text inside footprints (layer, text, board x,y; h text height)
C1: Top Overlay "+" at -25.295,21.578 h1.5 r180
C5: Top Overlay "+" at -50.833,44.716 h1.5
NodeMCU: Top Overlay "Vin" at -64.008,3.175 h1.52 r180; Top Overlay "GND" at -64.008,5.715 h1.52 r180; Top Overlay "RST" at -64.008,8.255 h1.52 r180; Top Overlay "EN" at -64.008,10.795 h1.52 r180; Top Overlay "3v3" at -64.008,13.335 h1.52 r180; Top Overlay "GND" at -64.008,15.875 h1.52 r180; Top Overlay "CLK" at -64.008,18.415 h1.52 r180; Top Overlay "SD0" at -64.008,20.955 h1.52 r180; Top Overlay "CMD" at -64.008,23.495 h1.52 r180; Top Overlay "SD1" at -64.008,26.035 h1.52 r180; Top Overlay "SD2" at -64.008,28.575 h1.52 r180; Top Overlay "SD3" at -64.008,31.115 h1.52 r180; Top Overlay "RSV" at -64.008,33.655 h1.52 r180; Top Overlay "RSV" at -64.008,36.195 h1.52 r180; Top Overlay "A0" at -64.008,38.735 h1.52 r180; Top Overlay "D0" at -43.18,38.608 h1.52 r180; Top Overlay "D1" at -43.18,36.068 h1.52 r180; Top Overlay "D2" at -43.18,33.528 h1.52 r180; Top Overlay "D3" at -43.18,30.988 h1.52 r180; Top Overlay "D4" at -43.18,28.448 h1.52 r180; Top Overlay "3v3" at -43.18,25.908 h1.52 r180; Top Overlay "GND" at -43.18,23.368 h1.52 r180; Top Overlay "D5" at -43.18,20.828 h1.52 r180; Top Overlay "D6" at -43.18,18.288 h1.52 r180; Top Overlay "D7" at -43.18,15.748 h1.52 r180; Top Overlay "D8" at -43.18,13.208 h1.52 r180; Top Overlay "Rx" at -43.18,10.668 h1.52 r180; Top Overlay "Tx" at -43.18,8.128 h1.52 r180; Top Overlay "GND" at -43.18,5.588 h1.52 r180; Top Overlay "3v3" at -43.18,3.048 h1.52 r180